# Altium PCB ServoShield.PcbDoc (part 1 of 3)
Units mm, origin at the board's own origin, x right, y up, seen from the top; angles counter-clockwise.
Board outline 82.5 x 82.5 mm, 2 copper layers (Top Layer, Bottom Layer); 43 components, 112 nets, 281 pads, 5423 vias.
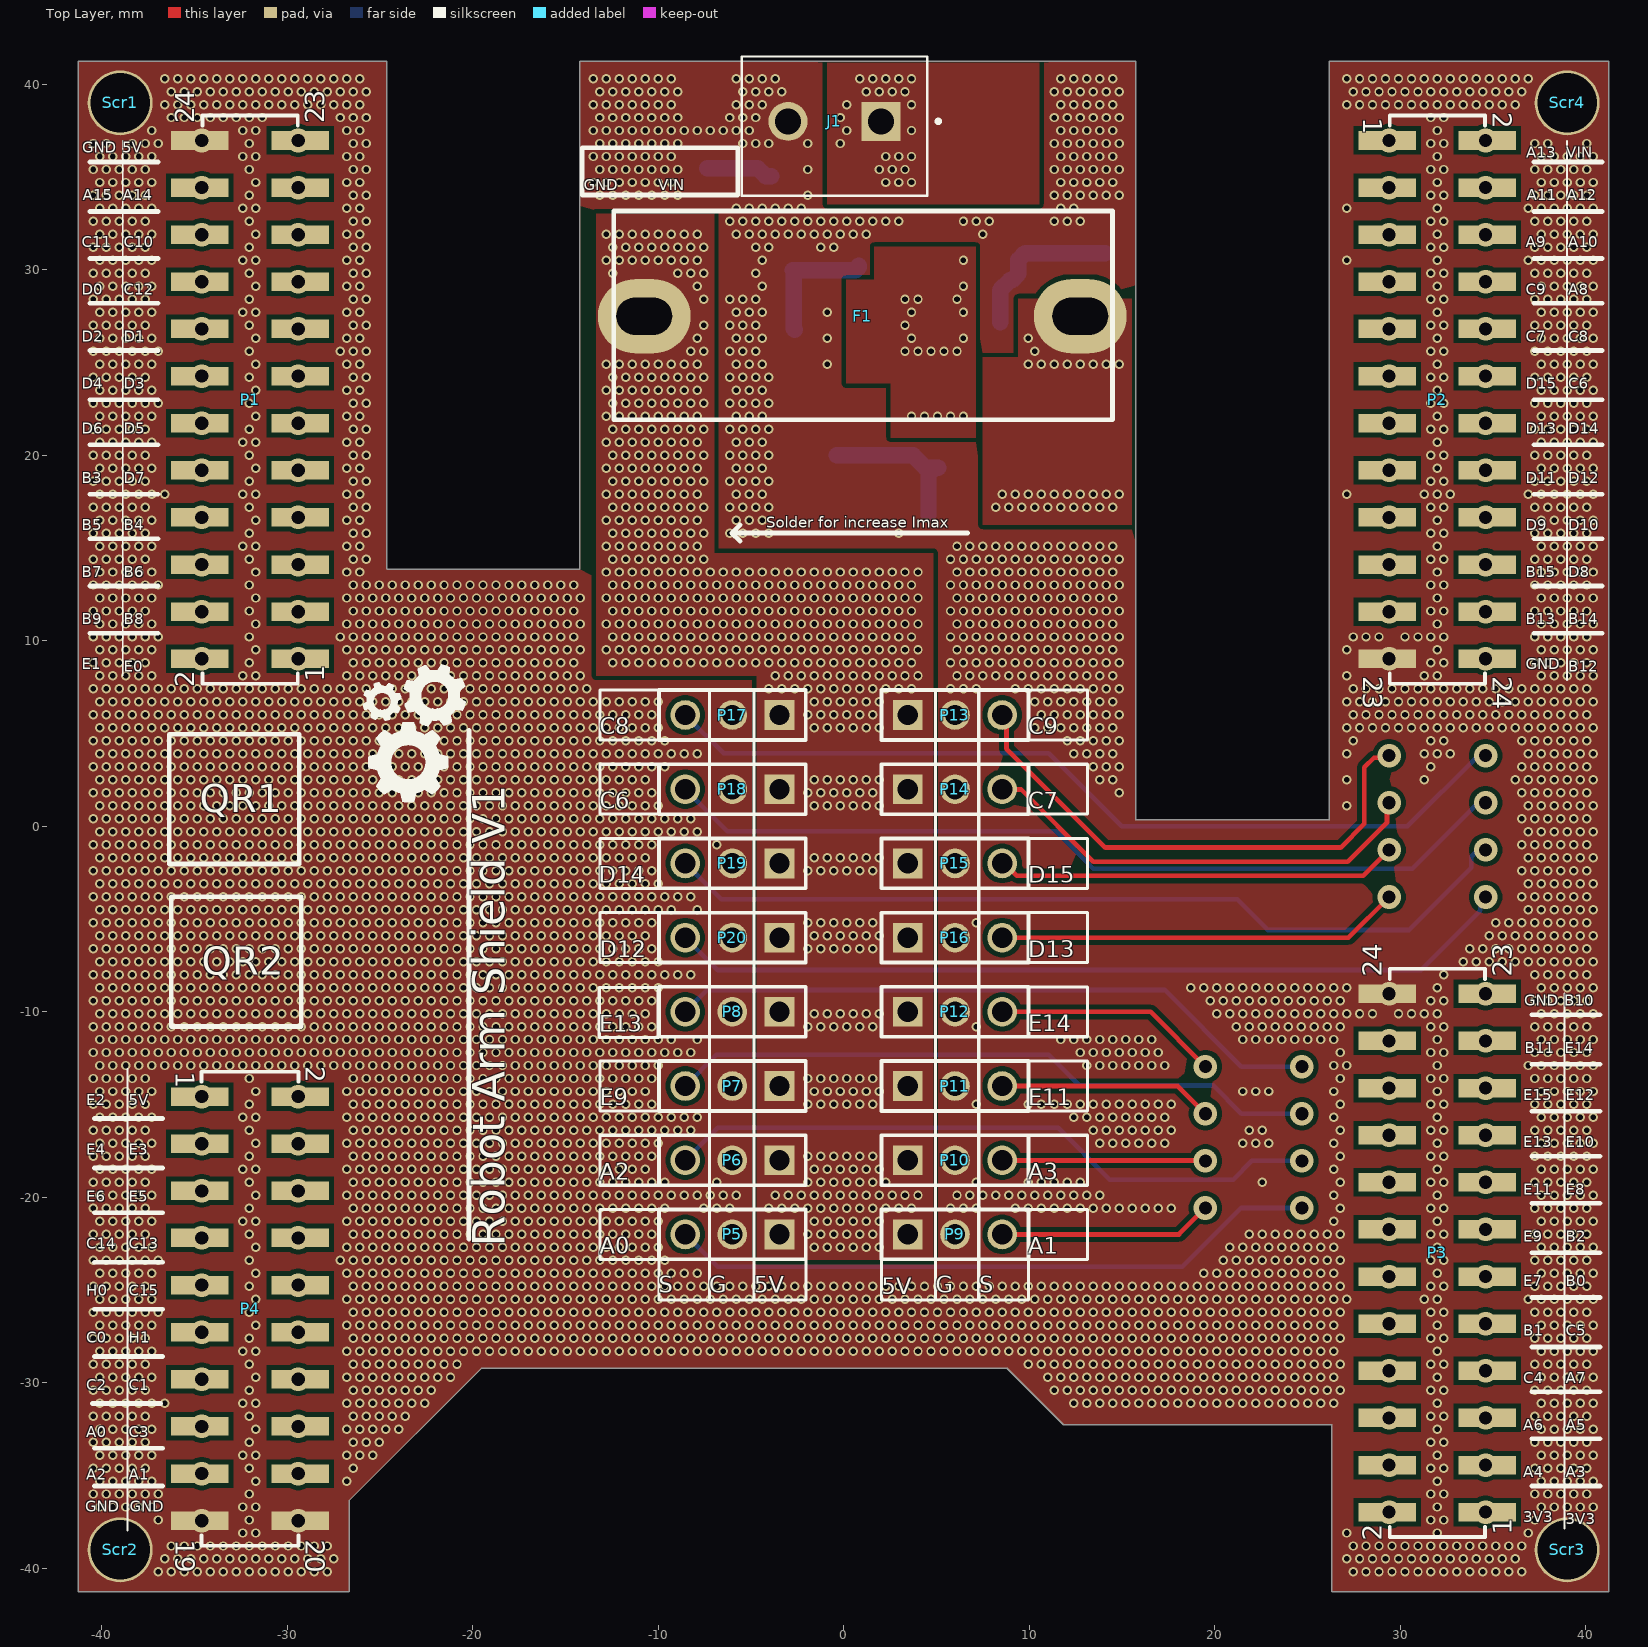
[diagram p0: Top Layer view]
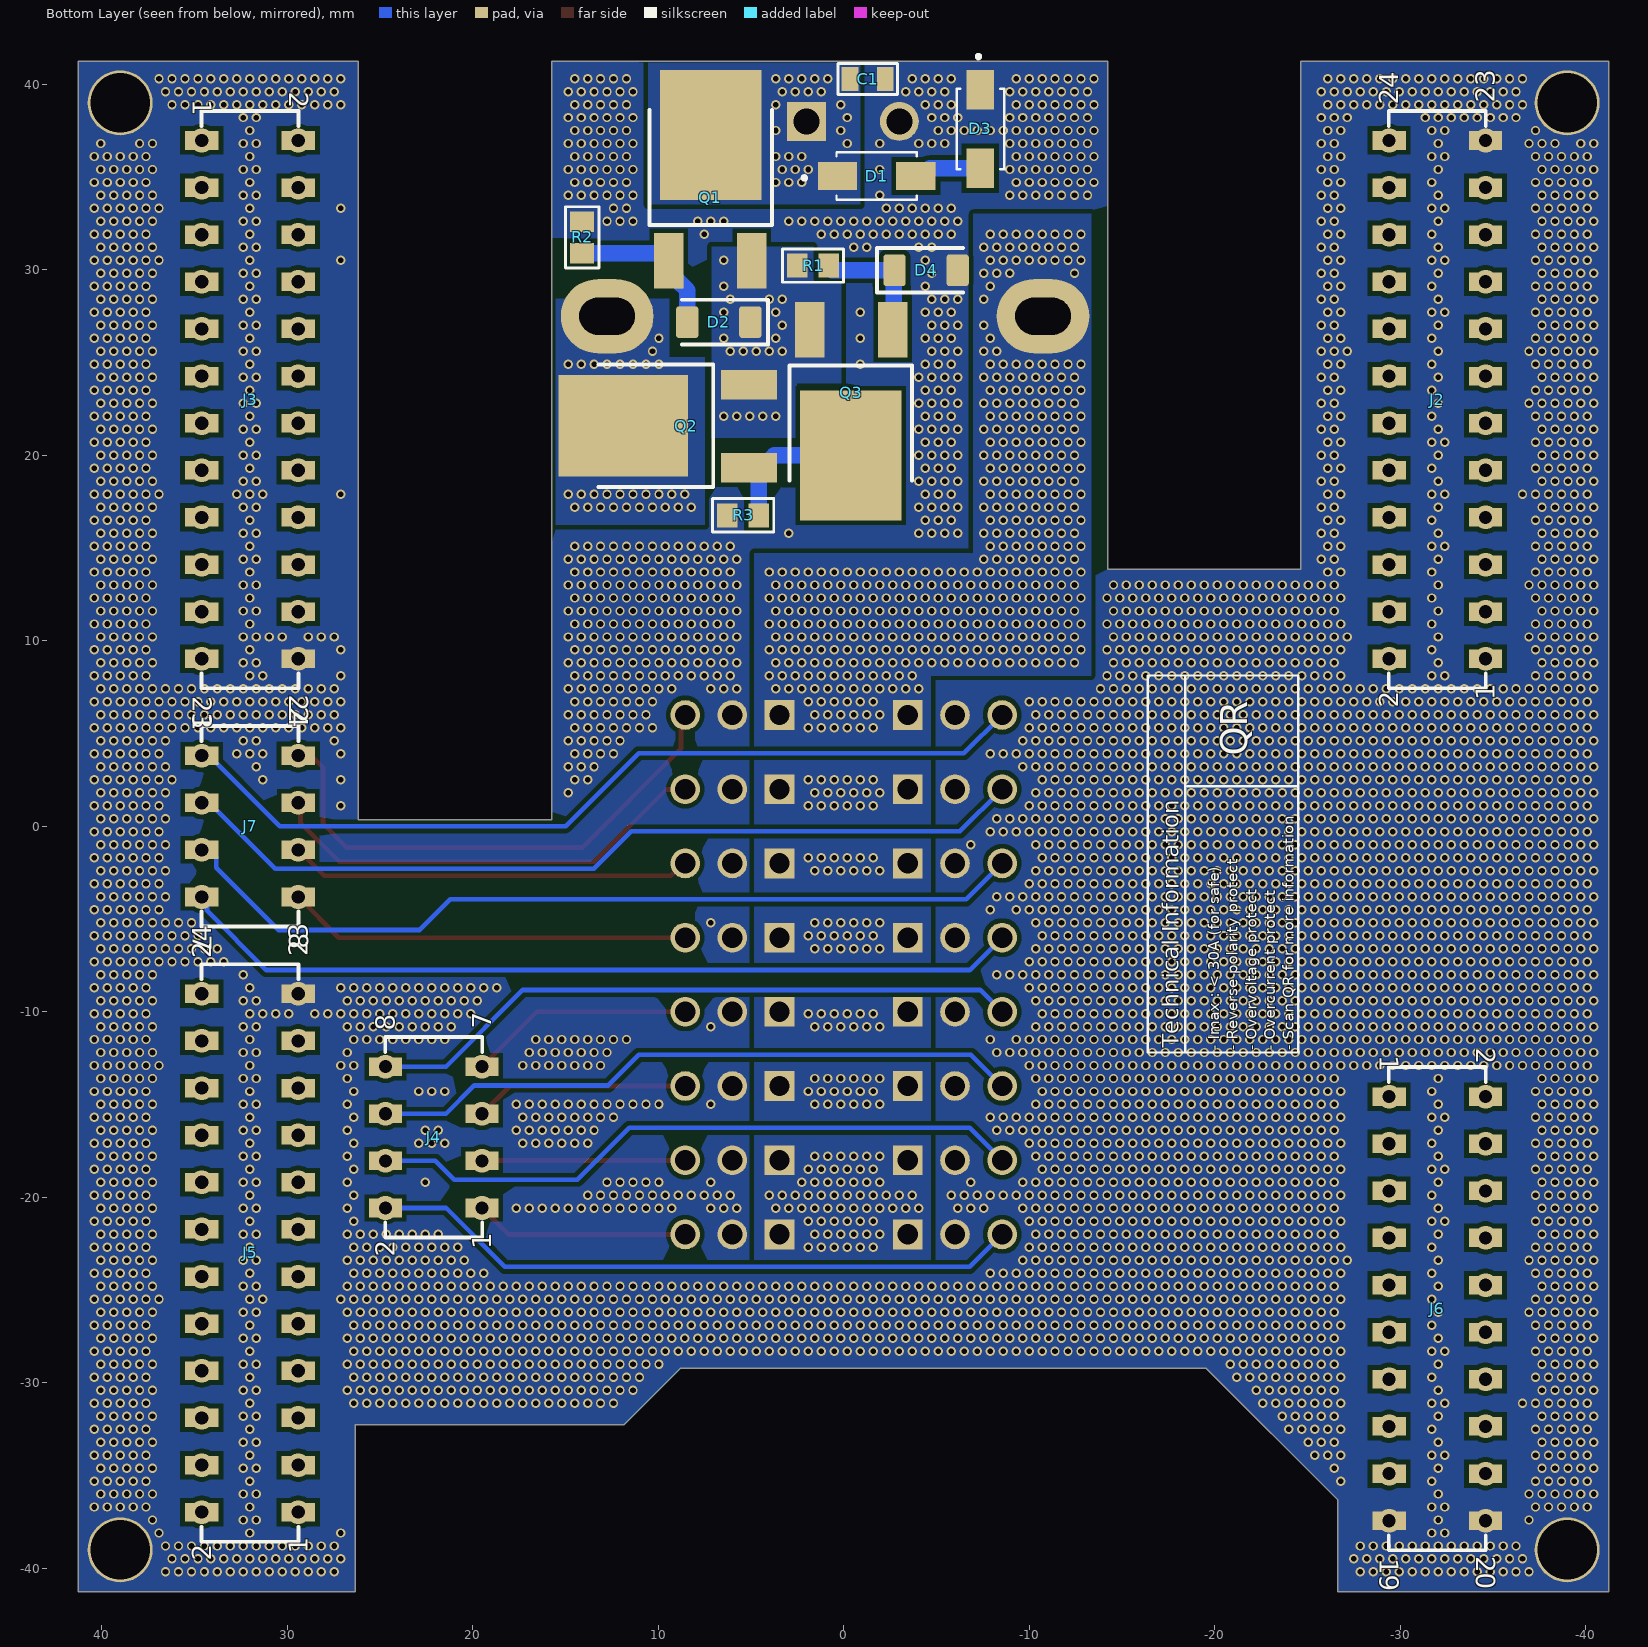
[diagram p1: Bottom Layer view, seen from below]
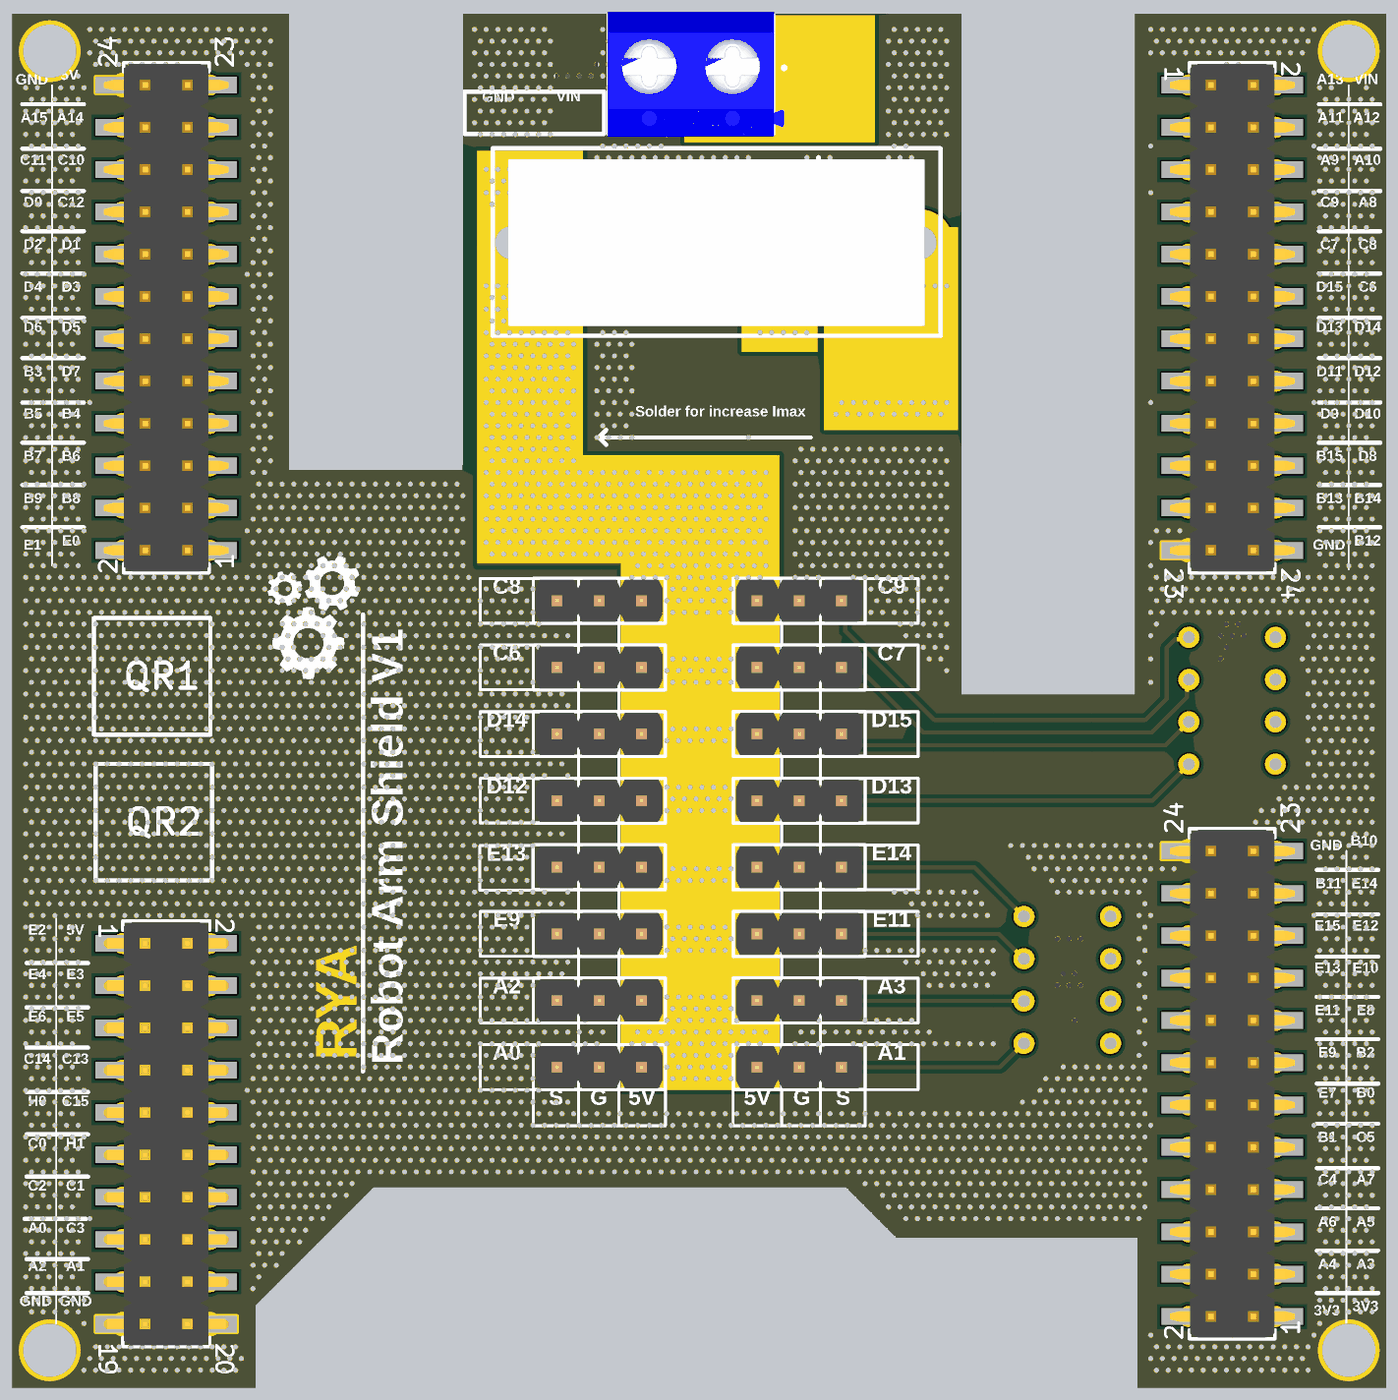
[diagram p4: 3D render of the assembled board from above, using the file's embedded part models]
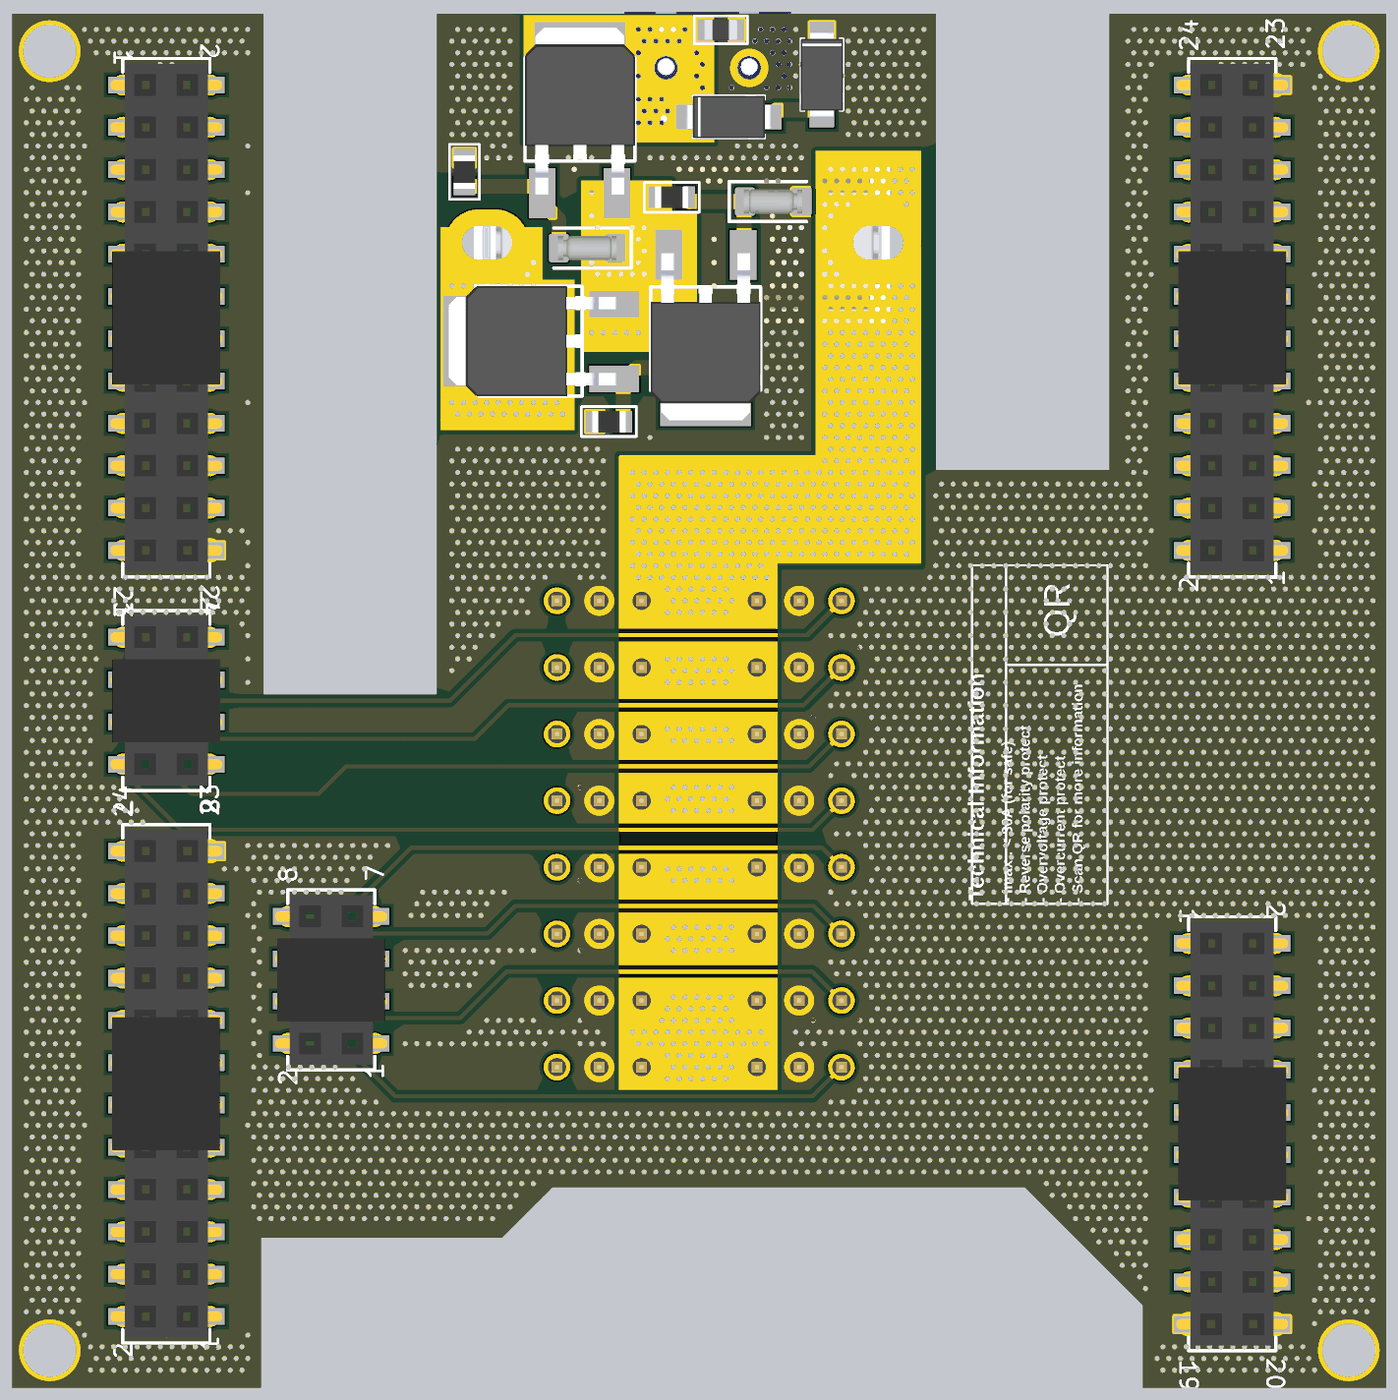
[diagram p5: 3D render of the assembled board from below, using the file's embedded part models]

## Layer stack, top to bottom
Top Solder: solder mask 0.0102, Solder Resist, Dk 3.5
Top Layer: signal copper 0.0356
Dielectric 1: dielectric 0.32, FR-4, Dk 4.8
Bottom Layer: signal copper 0.0356
Bottom Solder: solder mask 0.0102, Solder Resist, Dk 3.5

## Board outline
-26.643,-41.25 -26.643,-36.322 -19.531,-29.21 8.79,-29.21 11.838,-32.258 26.316,-32.258 26.316,-41.25 41.25,-41.25 41.25,41.25 26.162,41.25 26.162,0.356 15.748,0.356 15.748,41.25 -14.224,41.25 -14.224,13.848 -24.638,13.848 -24.638,41.25 -41.25,41.25 -41.25,-41.25

## Design rules (kind name [scope] priority, off if disabled: settings)
Clearance [All] p1: gap=0.254 ignorepadtopadclearanceinfootprint=FALSE
PolygonConnect [All] p1: connectstyle=Direct reliefconductorwidth=0.254 reliefentries=4 polygonreliefangle="90 Angle" airgapwidth=0.254
RoutingVias [All] p1: holewidth=0.711 width=1.27 viastyle="Through Hole" minholewidth=0.711 minwidth=1.27 maxholewidth=0.711 maxwidth=1.27
SolderMaskExpansion [All] p1: expansion=0.102 istentingtop=FALSE
SupplyNets "Schematic Supply Nets_8" [InNet('HD_3V3-1')] p1: voltage=0.000
SupplyNets "Schematic Supply Nets_7" [InNet('HD_5V-2')] p2: voltage=0.000
SupplyNets "Schematic Supply Nets_6" [InNet('HD_5V-1')] p3: voltage=0.000
SupplyNets "Schematic Supply Nets_4" [InNet('HD_Vin')] p4: voltage=0.000
SupplyNets "Schematic Supply Nets_2" [InNet('HD_3V3')] p5: voltage=0.000
SupplyNets "Schematic Supply Nets" [InNet('VDIn')] p6: voltage=0.000
SupplyNets "Schematic Supply Nets_3" [InNet('5V')] p7: voltage=0.000
SupplyNets "Schematic Supply Nets_1" [InNet('GND')] p8: voltage=0.000
Width "Schematic Width Constraint_13" [InNet('NetD2_K')] p1: maxlimit=2.54 minlimit=1.27 preferedwidth=1.27
Width "Schematic Width Constraint_12" [InNet('NetF1_0')] p2: maxlimit=2.54 minlimit=1.27 preferedwidth=1.27
Width "Schematic Width Constraint_11" [InNet('GND')] p3: maxlimit=12.7 minlimit=0.762 preferedwidth=0.889 minimp=50.000000 maximp=50.000000 favimp=50.000000
Width "Schematic Width Constraint_10" [InNet('NetD1_A')] p4: maxlimit=12.7 minlimit=0.762 preferedwidth=0.889 minimp=50.000000 maximp=50.000000 favimp=50.000000
Width "Schematic Width Constraint_9" [InNet('VDIn')] p5: maxlimit=12.7 minlimit=0.762 preferedwidth=0.889 minimp=50.000000 maximp=50.000000 favimp=50.000000
Width "Schematic Width Constraint_8" [InNet('NetD2_A')] p6: maxlimit=5.08 minlimit=0.762 preferedwidth=0.889 minimp=50.000000 maximp=50.000000 favimp=50.000000
Width "Schematic Width Constraint_7" [InNet('VDIn')] p7: maxlimit=5.08 minlimit=0.762 preferedwidth=0.889 minimp=50.000000 maximp=50.000000 favimp=50.000000
Width "Schematic Width Constraint_6" [InNet('NetD4_K')] p8: maxlimit=5.08 minlimit=0.762 preferedwidth=0.889
Width "Schematic Width Constraint_5" [InNet('NetQ2_1')] p9: maxlimit=5.08 minlimit=0.762 preferedwidth=0.889
Width "Schematic Width Constraint_4" [InNet('GND')] p10: maxlimit=5.08 minlimit=0.762 preferedwidth=0.889 minimp=50.000000 maximp=50.000000 favimp=50.000000
Width "Schematic Width Constraint_3" [InNet('NetF1_0')] p11: maxlimit=5.08 minlimit=0.762 preferedwidth=0.889
Width "Schematic Width Constraint_2" [InNet('NetD2_K')] p12: maxlimit=5.08 minlimit=0.762 preferedwidth=0.889 minimp=50.000000 maximp=50.000000 favimp=50.000000
Width "Schematic Width Constraint_1" [InNet('5V')] p13: maxlimit=5.08 minlimit=0.762 preferedwidth=0.889
Width "Schematic Width Constraint" [InNet('5V')] p14: maxlimit=2.54 minlimit=1.27 preferedwidth=1.27
Width [All] p15: maxlimit=0.254 minlimit=0.254 preferedwidth=0.254
30 further rules are at their usual default settings.

## Classes and differential pairs
component class U_Protect: C1 D1 D2 D3 D4 F1 Q1 Q2 Q3 R1 R2 R3
component class U_ServoConnect: P5 P6 P7 P8 P9 P10 P11 P12 P13 P14 P15 P16 P17 P18 P19 P20
component class U_MBoardConnect: J2 J3 J4 J5 J6 J7 P1 P2 P3 P4
component class TopLevelDesign: J1 Scr1 Scr2 Scr3 Scr4

## Components (designator, comment, footprint, x,y, rotation, side; value= is the part's Value field where it differs from the comment)
C1 "0108051041050" CAP_0805 -1.27,40.259 r0 bottom value=100nF
D1 "SMAJ18A" DIOM4325X250N -1.778,35.052 r180 bottom
D2 "ZMM5V1" SOD-80_MiniMELF_Glass 6.731,27.178 r0 bottom value=Shottky-Diode
D3 "SMAJ18A" DIOM4325X250N -7.366,37.592 r270 bottom
D4 "ZMM5V1" SOD-80_MiniMELF_Glass -4.445,29.972 r180 bottom value=Shottky-Diode
F1 "0605203000250" Fuse_Clip_0520 1,27.5 r180 top value="250 VAC, 10A"
J1 "KF301-2P" HANDSON_KF301-2P -0.5,38 r180 top
J2 "61032421821" 61032421821 -32,23 r90 bottom
J3 "61032421821" 61032421821 32,23 r270 bottom
J4 "61030821821" 61030821821 22.098,-16.764 r90 bottom
J5 "61032421821" 61032421821 32,-23 r90 bottom
J6 "61032021821" 61032021821 -32,-26 r270 bottom
J7 "61030821821" 61030821821 32,0 r270 bottom
P1 "61002421121" 61002421121 -32,23 r90 top
P2 "61002421121" 61002421121 32,23 r270 top
P3 "61002421121" 61002421121 32,-23 r90 top
P4 "61032021121" 61032021121 -32,-26 r270 top
P5 "61300311121" 61300311121 -6,-22 r180 top
P6 "61300311121" 61300311121 -6,-18 r180 top
P7 "61300311121" 61300311121 -6,-14 r180 top
P8 "61300311121" 61300311121 -6,-10 r180 top
P9 "61300311121" 61300311121 6,-22 r0 top
P10 "61300311121" 61300311121 6,-18 r0 top
P11 "61300311121" 61300311121 6,-14 r0 top
P12 "61300311121" 61300311121 6,-10 r0 top
P13 "61300311121" 61300311121 6,6 r0 top
P14 "61300311121" 61300311121 6,2 r0 top
P15 "61300311121" 61300311121 6,-2 r0 top
P16 "61300311121" 61300311121 6,-6 r0 top
P17 "61300311121" 61300311121 -6,6 r180 top
P18 "61300311121" 61300311121 -6,2 r180 top
P19 "61300311121" 61300311121 -6,-2 r180 top
P20 "61300311121" 61300311121 -6,-6 r180 top
Q1 "AOD4185" DPAK 7.163,35.408 r180 bottom
Q2 "AOD4185" DPAK 10.033,21.59 r90 bottom
Q3 "AOD4185" DPAK -0.381,21.844 r0 bottom
R1 "0008051031" RESISTOR_0805 1.651,30.226 r0 bottom value="10 KOhm, 1/8 W"
R2 "0008051031" RESISTOR_0805 14.097,31.75 r270 bottom value="10 KOhm, 1/8 W"
R3 "0008051031" RESISTOR_0805 5.422,16.764 r180 bottom value="10 KOhm, 1/8 W"
Scr1 "MP3.2" MP3.2 -39,39 r0 top
Scr2 "MP3.2" MP3.2 -39,-39 r0 top
Scr3 "MP3.2" MP3.2 39,-39 r0 top
Scr4 "MP3.2" MP3.2 39,39 r0 top

## Footprints (in the part's own frame and the unit in brackets; to place one, negate y for a bottom-side part, rotate by r counter-clockwise, add the part's x,y. Pads: shape width x height; smd on the part's side, far side on the other; paste and mask are expansions set on the pad)
61002421121 [mm] "Pin Header, pitch 2.54 mm, SMD, Vertical, dual row, 24p"
  rect 1x3.1 smd: 1(-13.97,-2.7) 2(-13.97,2.7) 3(-11.43,-2.7) 4(-11.43,2.7) 5(-8.89,-2.7) 6(-8.89,2.7) 7(-6.35,-2.7) 8(-6.35,2.7) 9(-3.81,-2.7) 10(-3.81,2.7) 11(-1.27,-2.7) 12(-1.27,2.7) 13(1.27,-2.7) 14(1.27,2.7) 15(3.81,-2.7) 16(3.81,2.7) 17(6.35,-2.7) 18(6.35,2.7) 19(8.89,-2.7) 20(8.89,2.7) 21(11.43,-2.7) 22(11.43,2.7) 23(13.97,-2.7) 24(13.97,2.7)
  silkscreen extent -15.32,-2.56 15.32,2.57, body extent -15.24,-3.75 15.24,3.75, height 9.62
61030821821 [mm] "Socket Header, Pitch 2.54 mm, SMT, Vertical, dual row, 8p"
  rect 1x1.8 smd: 1(-3.81,-2.6) 2(-3.81,2.6) 3(-1.27,-2.6) 4(-1.27,2.6) 5(1.27,-2.6) 6(1.27,2.6) 7(3.81,-2.6) 8(3.81,2.6)
  silkscreen extent -5.41,-2.62 5.41,2.62, body extent -5.08,-3.35 5.08,3.35, height 8.52
61032021121 [mm] "Pin Header, pitch 2.54 mm, SMD, Vertical, dual row, 20p"
  rect 1x3.1 smd: 1(-11.43,-2.7) 2(-11.43,2.7) 3(-8.89,-2.7) 4(-8.89,2.7) 5(-6.35,-2.7) 6(-6.35,2.7) 7(-3.81,-2.7) 8(-3.81,2.7) 9(-1.27,-2.7) 10(-1.27,2.7) 11(1.27,-2.7) 12(1.27,2.7) 13(3.81,-2.7) 14(3.81,2.7) 15(6.35,-2.7) 16(6.35,2.7) 17(8.89,-2.7) 18(8.89,2.7) 19(11.43,-2.7) 20(11.43,2.7)
  silkscreen extent -12.78,-2.62 12.78,2.62, body extent -12.7,-3.75 12.7,3.75, height 9.62
61032021821 [mm] "Socket Header, Pitch 2.54 mm, SMT, Vertical, dual row, 20p"
  rect 1x1.8 smd: 1(-11.43,-2.6) 2(-11.43,2.6) 3(-8.89,-2.6) 4(-8.89,2.6) 5(-6.35,-2.6) 6(-6.35,2.6) 7(-3.81,-2.6) 8(-3.81,2.6) 9(-1.27,-2.6) 10(-1.27,2.6) 11(1.27,-2.6) 12(1.27,2.6) 13(3.81,-2.6) 14(3.81,2.6) 15(6.35,-2.6) 16(6.35,2.6) 17(8.89,-2.6) 18(8.89,2.6) 19(11.43,-2.6) 20(11.43,2.6)
  silkscreen extent -13.03,-2.62 13.03,2.62, body extent -12.7,-3.35 12.7,3.35, height 8.52
61032421821 [mm] "Socket Header, Pitch 2.54 mm, SMT, Vertical, dual row, 24p"
  rect 1x1.8 smd: 1(-13.97,-2.6) 2(-13.97,2.6) 3(-11.43,-2.6) 4(-11.43,2.6) 5(-8.89,-2.6) 6(-8.89,2.6) 7(-6.35,-2.6) 8(-6.35,2.6) 9(-3.81,-2.6) 10(-3.81,2.6) 11(-1.27,-2.6) 12(-1.27,2.6) 13(1.27,-2.6) 14(1.27,2.6) 15(3.81,-2.6) 16(3.81,2.6) 17(6.35,-2.6) 18(6.35,2.6) 19(8.89,-2.6) 20(8.89,2.6) 21(11.43,-2.6) 22(11.43,2.6) 23(13.97,-2.6) 24(13.97,2.6)
  silkscreen extent -15.57,-2.62 15.57,2.62, body extent -15.24,-3.35 15.24,3.35, height 8.52
61300311121 [mm] "Pin Header, pitch 2.54 mm, THT, Vertical, single row, 3p"
  rect 1.6x1.6 hole 1.1: 1(-2.54,0)
  round 1.6 hole 1.1: 2(0,0) 3(2.54,0)
  silkscreen extent -3.96,-1.35 3.96,1.35, body extent -3.81,-1.27 3.81,1.27, height 8.57
CAP_0805 [mm]
  rect 0.9x1.3 smd: 1(-0.975,-0.025) 2(0.925,-0.025)
  silkscreen extent -1.63,-0.86 1.57,0.81, body extent -1.03,-0.65 0.97,0.6, height 0.6
DIOM4325X250N [mm]
  rect 2.12x1.5 smd: A(2.115,0) C(-2.115,0)
  silkscreen extent -4,-1.28 2.16,1.28, body extent -2.57,-1.28 2.57,1.28, height 2.5
DPAK [mil]
  rect 63x118 smd: 1(-89,-194) 3(87,-194)
  rect 214.63x275.59 smd: 4(0,72.94)
  silkscreen extent -130,-118 130,126, body extent -130,-198 130,198, height 94
Fuse_Clip_0520 [mm] "Clip Fuse, Size 0520"
  oval 5x4 hole 2 slot 3 at 0 deg: 0(-11.75,0) 1(11.75,0)
  silkscreen extent -13.49,-5.67 13.4,5.59, body extent -12.53,-5 12.47,5, height 15.1
HANDSON_KF301-2P [mm]
  rect 2.1x2.1 hole 1.4: 1(-2.5,0)
  round 2.1 hole 1.4: 2(2.5,0)
  silkscreen extent -5.7,-3.5 5,4, body extent -5.6,-3.37 5,4.13, height 10.13
MP3.2 [mm]
  round 3.5 hole 3.2: 1(0,0)
  body extent -2.75,-2.75 2.74,2.75, height 2.98
RESISTOR_0805 [mm] "Chip Resistor, 2-Leads, Body 2,00x1,20mm, IPC Medium Density"
  rect 1.1x1.3 smd: 1(-0.85,0) 2(0.85,0)
  silkscreen extent -1.65,-0.9 1.65,0.9, body extent -1,-0.65 1,0.65, height 0.45
SOD-80_MiniMELF_Glass [mm]
  rrect25% 1.2x1.7 smd: A(1.7,0) K(-1.7,0)
  silkscreen extent -2.65,-1.2 2,1.2, body extent -1.76,-0.72 1.74,0.72, height 1.45

## Part data
C1: library part CMP-001-00259-1, "CAP, size 0805, 0.1 nF, 50 VDC", Manufacture Name=TDK, Manufacture SN=CGA4J2X8R1H104K125AD, Operating Temperature="-55 to +125degC", Tolerance=10%, Voltage Rating DC="50 VDC", Component Type=Standard, Design Item ID=0108051041050, Mounting Technology=SMT, Packaging="Tape and Reel", Pins=2, Size=0805, Source=Capacitor_0805_10_percent.SchLib, Supplier 1 Name=Mouser, Supplier 1 SN=810-C2012X8R1H104KEP, Supplier 1 URL=https://www.mouser.vn/ProductDetail/TDK/CGA4J2X8R1H104K125AD?qs=LcTL%2F5vFEzExqZqv3rh1qQ%3D%3D&utm_source=mouser-refine-download&utm_medium=file&utm_campaign=CGA4J2X8R1H104K125AD&utm_content=TDK, Supplier 2 Name=Digi-Key, Supplier 2 SN=445-8810-2-ND, Supplier 2 URL=https://www.digikey.com/en/products/detail/tdk-corporation/cga4j2x8r1h104k125ad/3248169, Supplier 3 Name=thegioiic, Supplier 3 SN=OEM, Supplier 3 URL=N/A
D1 D3: library part CMP-004-00085-1, "400W, 21.1V, 5%, Unidirectional, TVS", Case/Package="SMA-2 Taiwan Semiconductor", Check_prices=https://www.snapeda.com/parts/SMAJ18A/taiwan/view-part/?ref=eda, Component Type=Standard, Design Item ID=SMAJ18A, MF="Taiwan Semiconductor", MP=SMAJ18A, Pins=2, SnapEDA_Link=https://www.snapeda.com/parts/SMAJ18A/taiwan/view-part/?ref=snap, Source=SMAJ18A.SchLib
D2 D4: library part CMP-004-00086-2, Component Type=Standard, Datasheet=https://diotec.com/de/produktliste/SBD.html, Design Item ID=Schottky-Diode, ki_description="Schottky Diode", ki_keywords=Schottky, Pins=2, Reference=D, Source=schottky-diode.SchLib
F1: library part CMP-005-00030-1, "Ceramic Fuse, Size 0520, 250 VAC, 30A", Hold Current=10A, Manufacturer=Littelfuse, Threshold Current="1.5kA (250VAC)", Threshold Voltage=250VAC, Component Type=Standard, ComponentLink1Description="Datasheet link", ComponentLink1URL=https://www.littelfuse.com/~/media/electronics/datasheets/fuses/littelfuse_fuse_234_datasheet.pdf.pdf, ComponentLink2Description="Supplier 1 URL", ComponentLink2URL=https://www.mouser.vn/ProductDetail/Littelfuse/0215010.MXP?qs=qI%252BDxnNls1%252BmXG81o%252BQ0mA%3D%3D, ComponentLink3Description="Supplier 2 URL", ComponentLink3URL=https://www.digikey.com/en/products/detail/littelfuse-inc/0215010-MXP/777449, ComponentLink4Description="Supplier 3 URL", ComponentLink4URL=https://www.thegioiic.com/cau-chi-su-10a-5x20mm, Design Item ID=0605201000250, Mounting Technology="Holder / Clip", Pins=2, Size=0520, Source=Fuse_Clip.SchLib, Supplier 1 Name=Mouser, Supplier 1 SN=576-0215010.MXP, Supplier 1 URL=https://www.mouser.vn/ProductDetail/Littelfuse/0215010.MXP?qs=qI%252BDxnNls1%252BmXG81o%252BQ0mA%3D%3D, Supplier 2 Name=Digi-Key, Supplier 2 SN=F1699-ND, Supplier 2 URL=https://www.digikey.com/en/products/detail/littelfuse-inc/0215010-MXP/777449, Supplier 3 Name=thegioiic, Supplier 3 SN=N/A, Supplier 3 URL=https://www.thegioiic.com/cau-chi-su-10a-5x20mm
J1: library part CMP-118-000001-1, "2 Pin Terminal Block 5mm Pitch", Package=None, Availability=Unavailable, Design Item ID=KF301-2P, MP=KF301-2P, Price=None, Source=KF301-2P.SchLib
J2 J3 J5: library part CMP-002-00462-1, "WR-PHD Socket Header, SMT, pitch 2.54mm, Dual Row, Vertical, 24p", Contact Resistance=20mOhm, Manufacturer="Wurth Elektronik", Operating Temperature="-40 to +105degC", Rated Current=3A, Withstanding Voltage=600VAC, Working Voltage=250VAC, Component Type=Standard, ComponentLink1Description=Manufacturer, ComponentLink1URL=http://www.we-online.de, ComponentLink2Description=Datasheet, ComponentLink2URL=https://www.we-online.com/catalog/datasheet/61032421821.pdf, ComponentLink3Description="Global Supply", ComponentLink3URL=https://www.we-online.com/en/components/products/PHD_2_54_SMT_DUAL_SOCKET_HEADER_6100XX21821?sq=61032421821#61032421821, ComponentLink4Description="Global Supply", ComponentLink4URL=https://www.mouser.vn/ProductDetail/Wurth-Elektronik/61032421821?qs=Cb2nCFKsA8olwuXV8WYPMw%3D%3D, Design Item ID=61032421821, Gender="Socket Header", Manufacturer Part Number=61032421821, Mounting Technology=SMT, Orientation=Vertical, Packaging="Tape and Reel", Pin Number=24, Pins=24, Pitch=2.54mm, Published Date="May 2020", Row Number=Dual, Source="WR-PHD_Socket Header_2.54mm.SchLib", Supplier 1 Name=Mouser, Supplier 1 SN=710-61032421821, Supplier 1 URL=https://www.mouser.vn/ProductDetail/Wurth-Elektronik/61032421821?qs=Cb2nCFKsA8olwuXV8WYPMw%3D%3D, Supplier 2 Name=Digi-Key, Supplier 2 SN=N/A, Supplier 2 URL=N/A, Supplier 3 Name=thegioiic, Supplier 3 SN=N/A, Supplier 3 URL=N/A, System=Connector
J4 J7: library part CMP-002-00443-1, "WR-PHD Socket Header, SMT, pitch 2.54mm, Dual Row, Vertical, 8p", Contact Resistance=20mOhm, Manufacturer="Wurth Elektronik", Operating Temperature="-40 to +105degC", Rated Current=3A, Withstanding Voltage=600VAC, Working Voltage=250VAC, Component Type=Standard, ComponentLink1Description=Manufacturer, ComponentLink1URL=http://www.we-online.de, ComponentLink2Description=Datasheet, ComponentLink2URL=https://www.we-online.com/catalog/datasheet/61030821821.pdf, ComponentLink3Description="Global Supply", ComponentLink3URL=https://www.we-online.com/en/components/products/PHD_2_54_SMT_DUAL_SOCKET_HEADER_6100XX21821?sq=61030821821#61030821821, ComponentLink4Description="Global Supply", ComponentLink4URL=https://www.mouser.vn/ProductDetail/Wurth-Elektronik/61030821821?qs=Cb2nCFKsA8oJEHHhLPQ3%2Fg%3D%3D, Design Item ID=61030821821, Gender="Socket Header", Manufacturer Part Number=61030821821, Mounting Technology=SMT, Orientation=Vertical, Packaging="Tape and Reel", Pin Number=8, Pins=8, Pitch=2.54mm, Published Date="May 2020", Row Number=Dual, Source="WR-PHD_Socket Header_2.54mm.SchLib", Supplier 1 Name=Mouser, Supplier 1 SN=710-61030821821, Supplier 1 URL=https://www.mouser.vn/ProductDetail/Wurth-Elektronik/61030821821?qs=Cb2nCFKsA8oJEHHhLPQ3%2Fg%3D%3D, Supplier 2 Name=Digi-Key, Supplier 2 SN=N/A, Supplier 2 URL=N/A, Supplier 3 Name=thegioiic, Supplier 3 SN=N/A, Supplier 3 URL=N/A, System=Connector
J6: library part CMP-002-00459-1, "WR-PHD Socket Header, SMT, pitch 2.54mm, Dual Row, Vertical, 20p", Contact Resistance=20mOhm, Manufacturer="Wurth Elektronik", Operating Temperature="-40 to +105degC", Rated Current=3A, Withstanding Voltage=600VAC, Working Voltage=250VAC, Component Type=Standard, ComponentLink1Description=Manufacturer, ComponentLink1URL=http://www.we-online.de, ComponentLink2Description=Datasheet, ComponentLink2URL=https://www.we-online.com/catalog/datasheet/61032021821.pdf, ComponentLink3Description="Global Supply", ComponentLink3URL=https://www.we-online.com/en/components/products/PHD_2_54_SMT_DUAL_SOCKET_HEADER_6100XX21821?sq=61032021821#61032021821, ComponentLink4Description="Global Supply", ComponentLink4URL=https://www.mouser.vn/ProductDetail/Wurth-Elektronik/61032021821?qs=Cb2nCFKsA8rLJ0ZbRtJw1w%3D%3D, Design Item ID=61032021821, Gender="Socket Header", Manufacturer Part Number=61032021821, Mounting Technology=SMT, Orientation=Vertical, Packaging="Tape and Reel", Pin Number=20, Pins=20, Pitch=2.54mm, Published Date="May 2020", Row Number=Dual, Source="WR-PHD_Socket Header_2.54mm.SchLib", Supplier 1 Name=Mouser, Supplier 1 SN=710-61032021821, Supplier 1 URL=https://www.mouser.vn/ProductDetail/Wurth-Elektronik/61032021821?qs=Cb2nCFKsA8rLJ0ZbRtJw1w%3D%3D, Supplier 2 Name=Digi-Key, Supplier 2 SN=N/A, Supplier 2 URL=N/A, Supplier 3 Name=thegioiic, Supplier 3 SN=N/A, Supplier 3 URL=N/A, System=Connector
P1 P2 P3: library part CMP-002-00395-1, "WR-PHD Pin Header, SMT, pitch 2.54mm, Dual Row, Vertical, 24p", Contact Resistance=20mOhm, Manufacturer="Wurth Elektronik", Operating Temperature="-40 to +125degC", Rated Current=3A, Withstanding Voltage=500VAC, Working Voltage=250VAC, Component Type=Standard, ComponentLink1Description=Manufacturer, ComponentLink1URL=http://www.we-online.de, ComponentLink2Description=Datasheet, ComponentLink2URL=https://www.we-online.com/catalog/datasheet/61002421121.pdf, ComponentLink3Description="Global Supply", ComponentLink3URL=https://www.we-online.com/en/components/products/PHD_2_54_SMT_DUAL_PIN_HEADER_6100XX21121?sq=61002421121#61002421121, ComponentLink4Description="Global Supply", ComponentLink4URL=https://www.mouser.vn/ProductDetail/Wurth-Elektronik/61002421121?qs=PhR8RmCirEaUrVIpVd3oMg%3D%3D, Design Item ID=61002421121, Gender="Pin Header", Manufacturer Part Number=61002421121, Mounting Technology=SMT, Orientation=Vertical, Packaging=Tube, Pin Number=24, Pins=24, Pitch=2.54mm, Published Date="May 2020", Row Number=Dual, Source="WR-PHD_Pin Header_2.54mm.SchLib", Supplier 1 Name=Mouser, Supplier 1 SN=710-61002421121, Supplier 1 URL=https://www.mouser.vn/ProductDetail/Wurth-Elektronik/61002421121?qs=PhR8RmCirEaUrVIpVd3oMg%3D%3D, Supplier 2 Name=Digi-Key, Supplier 2 SN=N/A, Supplier 2 URL=N/A, Supplier 3 Name=thegioiic, Supplier 3 SN=N/A, Supplier 3 URL=N/A, Supply name 1=Mouser, System=Connector
P4: library part CMP-002-00458-1, "WR-PHD Pin Header, SMT, pitch 2.54mm, Dual Row, Vertical, 20p", Contact Resistance=20mOhm, Manufacturer="Wurth Elektronik", Operating Temperature="-40 to +125degC", Rated Current=3A, Withstanding Voltage=500VAC, Working Voltage=250VAC, Component Type=Standard, ComponentLink1Description=Manufacturer, ComponentLink1URL=http://www.we-online.de, ComponentLink2Description=Datasheet, ComponentLink2URL=https://www.we-online.com/catalog/datasheet/61032021121.pdf, ComponentLink3Description="Global Supply", ComponentLink3URL=https://www.we-online.com/en/components/products/PHD_2_54_SMT_DUAL_PIN_HEADER_6100XX21121?sq=61032021121#61032021121, ComponentLink4Description="Global Supply", ComponentLink4URL=https://www.mouser.vn/ProductDetail/Wurth-Elektronik/61032021121?qs=PhR8RmCirEazLxlZVVgCjg%3D%3D, Design Item ID=61032021121, Gender="Pin Header", Manufacturer Part Number=61032021121, Mounting Technology=SMT, Orientation=Vertical, Packaging="Tape and Reel", Pin Number=20, Pins=20, Pitch=2.54mm, Published Date="May 2020", Row Number=Dual, Source="WR-PHD_Pin Header_2.54mm.SchLib", Supplier 1 Name=Mouser, Supplier 1 SN=710-61032021121, Supplier 1 URL=https://www.mouser.vn/ProductDetail/Wurth-Elektronik/61032021121?qs=PhR8RmCirEazLxlZVVgCjg%3D%3D, Supplier 2 Name=Digi-Key, Supplier 2 SN=N/A, Supplier 2 URL=N/A, Supplier 3 Name=thegioiic, Supplier 3 SN=N/A, Supplier 3 URL=N/A, Supply name 1=Mouser, System=Connector
P5 P6 P7 P8 P9 P10 P11 P12 P13 P14 P15 P16 P17 P18 P19 P20: library part CMP-002-00470-1, "WR-PHD Pin Header, THT, pitch 2.54mm, Single Row, Vertical, 3p", Contact Resistance=20mOhm, Manufacturer="Wurth Elektronik", Operating Temperature="-40 to +105degC", Rated Current=3A, Withstanding Voltage=500VAC, Working Voltage=250VAC, Component Type=Standard, ComponentLink1Description=Manufacturer, ComponentLink1URL=http://www.we-online.de, ComponentLink2Description=Datasheet, ComponentLink2URL=https://www.we-online.com/catalog/datasheet/61300311121.pdf, ComponentLink3Description="Global Supply", ComponentLink3URL=https://www.mouser.vn/ProductDetail/Wurth-Elektronik/61300311121?qs=PhR8RmCirEYxRWFJzNKsUw%3D%3D, Design Item ID=61300311121, Gender="Pin Header", Manufacturer Part Number=61300311121, Mounting Technology=THT, Orientation=Vertical, Packaging=Bag, Pin Number=3, Pins=3, Pitch=2.54mm, Published Date="May 2020", Row Number=Single, Source="WR-PHD_Pin Header_2.54mm.SchLib", Supplier 1 Name=Mouser, Supplier 1 SN=710-61300311121, Supplier 1 URL=https://www.mouser.vn/ProductDetail/Wurth-Elektronik/61300311121?qs=PhR8RmCirEYxRWFJzNKsUw%3D%3D, Supplier 2 Name=Digi-Key, Supplier 2 SN=N/A, Supplier 2 URL=N/A, Supplier 3 Name=thegioiic, Supplier 3 SN=N/A, Supplier 3 URL=N/A, Supply name 1=Mouser
Q1 Q2 Q3: library part CMP-123-000001-2, "P-Channel 40V 40A (Tc) 2.5W (Ta), 62.5W (Tc) Surface Mount TO-252, (D-Pak)", Package="TO-252 Alpha &amp; Omega Semiconductor", Check_prices=https://www.snapeda.com/parts/AOD4185/Alpha/view-part/?ref=eda, Component Type=Standard, Design Item ID=AOD4185, MF="Alpha &", MP=AOD4185, Pin Count=3, SnapEDA_Link=https://www.snapeda.com/parts/AOD4185/Alpha/view-part/?ref=snap, Source=AOD4185.SchLib
R1 R2 R3: library part CMP-009-00482-1, "RES, size 0805, 10 KOhm, 1/8 W", Manufacture  Name="Vishay Dale", Manufacture  SN=CRCW080515K0FKEAC, Rated Power="1/8 W", Resistance Tolerance=+/-1%, Component Type=Standard, ComponentLink1Description="Datasheet link", ComponentLink1URL=https://www.vishay.com/docs/28773/crcwce3.pdf, ComponentLink2Description="Supplier 1 URL", ComponentLink2URL=https://www.mouser.vn/ProductDetail/Vishay-Dale/CRCW080515K0FKEA?qs=bMjB6bAaLEM4rXT2DoR3BA%3D%3D, ComponentLink3Description="Supplier 2 URL", ComponentLink3URL=https://www.digikey.com/en/products/detail/vishay-dale/CRCW080515K0FKEAC/7928558, ComponentLink4Description="Supplier 3 URL", ComponentLink4URL=N/A, Design Item ID=0008051531, Mounting Technology=SMT, Pins=2, Size=0805, Source=Resistor_0805.SchLib, Supplier 1 Name=Mouser, Supplier 1 SN=71-CRCW0805-15K-E3, Supplier 1 URL=https://www.mouser.vn/ProductDetail/Vishay-Dale/CRCW080515K0FKEA?qs=bMjB6bAaLEM4rXT2DoR3BA%3D%3D, Supplier 2 Name=Digi-Key, Supplier 2 SN=541-4136-2-ND, Supplier 2 URL=https://www.digikey.com/en/products/detail/vishay-dale/CRCW080515K0FKEAC/7928558, Supplier 3 Name=Thegioiic, Supplier 3 SN=N/A, Supplier 3 URL=N/A
Scr1 Scr2 Scr3 Scr4: library part CMP-143-000000-1, Component Type=Standard, Design Item ID=MP3.2, Pin Count=1, Source=MP_3P2.SchLib

## Via types
v1: diameter 0.508, hole 0.3, Top Layer to Bottom Layer, tented both sides, 5315 vias
v2: diameter 1.27, hole 0.711, Top Layer to Bottom Layer, 108 vias

## Nets (pads, with @x,y where several pads share a name; then routed paths per layer and width w, separated by ;. In a path a pad name is that pad's centre, name@x,y a point inside that pad or via, vN(x,y) a via of type N, cw(c..) or ccw(c..) an arc to the next point about the centre after c; other vN are vias at no path point)
5V: F1.1 P5.1 P6.1 P7.1 P8.1 P9.1 P10.1 P11.1 P12.1 P13.1 P14.1 P15.1 P16.1 P17.1 P18.1 P19.1 P20.1
  other v1: -1.593,-22.693 -0.893,-22.693 -0.193,-22.693 0.507,-22.693 1.207,-22.693 1.907,-22.693 -1.943,-21.993 -1.243,-21.993 -0.543,-21.993 0.157,-21.993 0.857,-21.993 1.557,-21.993 -1.593,-21.293 -0.893,-21.293 -0.193,-21.293 0.507,-21.293 1.207,-21.293 1.907,-21.293 -4.043,-20.593 -3.343,-20.593 -2.643,-20.593 -1.943,-20.593 -1.243,-20.593 -0.543,-20.593 0.157,-20.593 0.857,-20.593 1.557,-20.593 2.257,-20.593 2.957,-20.593 3.657,-20.593 -3.693,-19.893 -2.993,-19.893 -2.293,-19.893 -1.593,-19.893 -0.893,-19.893 -0.193,-19.893 0.507,-19.893 1.207,-19.893 1.907,-19.893 2.607,-19.893 3.307,-19.893 4.007,-19.893 -1.943,-19.193 -1.243,-19.193 -0.543,-19.193 0.157,-19.193 0.857,-19.193 1.557,-19.193 2.257,-19.193 -1.593,-18.493 -0.893,-18.493 -0.193,-18.493 0.507,-18.493 1.207,-18.493 1.907,-18.493 -1.943,-17.793 -1.243,-17.793 -0.543,-17.793 0.157,-17.793 0.857,-17.793 1.557,-17.793 -1.943,-14.993 -1.243,-14.993 -0.543,-14.993 0.157,-14.993 0.857,-14.993 1.557,-14.993 -1.593,-14.293 -0.893,-14.293 -0.193,-14.293 0.507,-14.293 1.207,-14.293 1.907,-14.293 -1.943,-13.593 -1.243,-13.593 -0.543,-13.593 0.157,-13.593 0.857,-13.593 1.557,-13.593 -1.943,-10.793 -1.243,-10.793 -0.543,-10.793 0.157,-10.793 0.857,-10.793 1.557,-10.793 -1.593,-10.093 -0.893,-10.093 -0.193,-10.093 0.507,-10.093 1.207,-10.093 1.907,-10.093 -1.943,-6.593 -1.243,-6.593 -0.543,-6.593 0.157,-6.593 0.857,-6.593 1.557,-6.593 -1.593,-5.893 -0.893,-5.893 -0.193,-5.893 0.507,-5.893 1.207,-5.893 1.907,-5.893 -1.943,-5.193 -1.243,-5.193 -0.543,-5.193 0.157,-5.193 0.857,-5.193 1.557,-5.193 -1.943,-2.393 -1.243,-2.393 -0.543,-2.393 0.157,-2.393 0.857,-2.393 1.557,-2.393 -1.593,-1.693 -0.893,-1.693 -0.193,-1.693 0.507,-1.693 1.207,-1.693 1.907,-1.693 -1.593,1.107 -0.893,1.107 -0.193,1.107 0.507,1.107 1.207,1.107 1.907,1.107 -1.943,1.807 -1.243,1.807 -0.543,1.807 0.157,1.807 0.857,1.807 1.557,1.807 -1.593,2.507 -0.893,2.507 -0.193,2.507 0.507,2.507 1.207,2.507 1.907,2.507 -1.593,5.307 -0.893,5.307 -0.193,5.307 0.507,5.307 1.207,5.307 1.907,5.307 -1.943,6.007 -1.243,6.007 -0.543,6.007 0.157,6.007 0.857,6.007 1.557,6.007 -1.593,6.707 -0.893,6.707 -0.193,6.707 0.507,6.707 1.207,6.707 1.907,6.707 -4.043,7.407 -3.343,7.407 -2.643,7.407 -1.943,7.407 -1.243,7.407 -0.543,7.407 0.157,7.407 0.857,7.407 1.557,7.407 2.257,7.407 2.957,7.407 3.657,7.407 -3.693,8.107 -2.993,8.107 -2.293,8.107 -1.593,8.107 -0.893,8.107 -0.193,8.107 0.507,8.107 1.207,8.107 1.907,8.107 2.607,8.107 3.307,8.107 4.007,8.107 -12.443,8.807 -11.743,8.807 -11.043,8.807 -10.343,8.807 -9.643,8.807 -8.943,8.807 -8.243,8.807 -7.543,8.807 -6.843,8.807 -6.143,8.807 -5.443,8.807 -4.743,8.807 -4.043,8.807 -3.343,8.807 -2.643,8.807 -1.943,8.807 -1.243,8.807 -0.543,8.807 0.157,8.807 0.857,8.807 1.557,8.807 2.257,8.807 2.957,8.807 3.657,8.807 -12.793,9.507 -12.093,9.507 -11.393,9.507 -10.693,9.507 -9.993,9.507 -9.293,9.507 -8.593,9.507 -7.893,9.507 -7.193,9.507 -6.493,9.507 -5.793,9.507 -5.093,9.507 -4.393,9.507 -3.693,9.507 -2.993,9.507 -2.293,9.507 -1.593,9.507 -0.893,9.507 -0.193,9.507 0.507,9.507 1.207,9.507 1.907,9.507 2.607,9.507 3.307,9.507 4.007,9.507 -12.443,10.207 -11.743,10.207 -11.043,10.207 -10.343,10.207 -9.643,10.207 -8.943,10.207 -8.243,10.207 -7.543,10.207 -6.843,10.207 -6.143,10.207 -5.443,10.207 -4.743,10.207 -4.043,10.207 -3.343,10.207 -2.643,10.207 -1.943,10.207 -1.243,10.207 -0.543,10.207 0.157,10.207 0.857,10.207 1.557,10.207 2.257,10.207 2.957,10.207 3.657,10.207 -12.793,10.907 -12.093,10.907 -11.393,10.907 -10.693,10.907 -9.993,10.907 -9.293,10.907 -8.593,10.907 -7.893,10.907 -7.193,10.907 -6.493,10.907 -5.793,10.907 -5.093,10.907 -4.393,10.907 -3.693,10.907 -2.993,10.907 -2.293,10.907 -1.593,10.907 -0.893,10.907 -0.193,10.907 0.507,10.907 1.207,10.907 1.907,10.907 2.607,10.907 3.307,10.907 4.007,10.907 -12.443,11.607 -11.743,11.607 -11.043,11.607 -10.343,11.607 -9.643,11.607 -8.943,11.607 -8.243,11.607 -7.543,11.607 -6.843,11.607 -6.143,11.607 -5.443,11.607 -4.743,11.607 -4.043,11.607 -3.343,11.607 -2.643,11.607 -1.943,11.607 -1.243,11.607 -0.543,11.607 0.157,11.607 0.857,11.607 1.557,11.607 2.257,11.607 2.957,11.607 3.657,11.607 -12.793,12.307 -12.093,12.307 -11.393,12.307 -10.693,12.307 -9.993,12.307 -9.293,12.307 -8.593,12.307 -7.893,12.307 -7.193,12.307 -6.493,12.307 -5.793,12.307 -5.093,12.307 -4.393,12.307 -3.693,12.307 -2.993,12.307 -2.293,12.307 -1.593,12.307 -0.893,12.307 -0.193,12.307 0.507,12.307 1.207,12.307 1.907,12.307 2.607,12.307 3.307,12.307 4.007,12.307 -12.443,13.007 -11.743,13.007 -11.043,13.007 -10.343,13.007 -9.643,13.007 -8.943,13.007 -8.243,13.007 -7.543,13.007 -6.843,13.007 -6.143,13.007 -5.443,13.007 -4.743,13.007 -4.043,13.007 -3.343,13.007 -2.643,13.007 -1.943,13.007 -1.243,13.007 -0.543,13.007 0.157,13.007 0.857,13.007 1.557,13.007 2.257,13.007 2.957,13.007 3.657,13.007 -12.793,13.707 -12.093,13.707 -11.393,13.707 -10.693,13.707 -9.993,13.707 -9.293,13.707 -8.593,13.707 -7.893,13.707 -7.193,13.707 -6.493,13.707 -5.793,13.707 -5.093,13.707 -4.393,13.707 -3.693,13.707 -2.993,13.707 -2.293,13.707 -1.593,13.707 -0.893,13.707 -0.193,13.707 0.507,13.707 1.207,13.707 1.907,13.707 2.607,13.707 3.307,13.707 4.007,13.707 -12.443,14.407 -11.743,14.407 -11.043,14.407 -10.343,14.407 -9.643,14.407 -8.943,14.407 -8.243,14.407 -7.543,14.407 -12.793,15.107 -12.093,15.107 -11.393,15.107 -10.693,15.107 -9.993,15.107 -9.293,15.107 -8.593,15.107 -7.893,15.107 -12.443,15.807 -11.743,15.807 -11.043,15.807 -10.343,15.807 -9.643,15.807 -8.943,15.807 -8.243,15.807 -7.543,15.807 -12.793,16.507 -12.093,16.507 -11.393,16.507 -10.693,16.507 -9.993,16.507 -9.293,16.507 -8.593,16.507 -7.893,16.507 -12.443,17.207 -11.743,17.207 -11.043,17.207 -10.343,17.207 -9.643,17.207 -8.943,17.207 -8.243,17.207 -7.543,17.207 -12.793,17.907 -12.093,17.907 -11.393,17.907 -10.693,17.907 -9.993,17.907 -9.293,17.907 -8.593,17.907 -7.893,17.907 -12.443,18.607 -11.743,18.607 -11.043,18.607 -10.343,18.607 -9.643,18.607 -8.943,18.607 -8.243,18.607 -7.543,18.607 -12.793,19.307 -12.093,19.307 -11.393,19.307 -10.693,19.307 -9.993,19.307 -9.293,19.307 -8.593,19.307 -7.893,19.307 -12.443,20.007 -11.743,20.007 -11.043,20.007 -10.343,20.007 -9.643,20.007 -8.943,20.007 -8.243,20.007 -7.543,20.007 -12.793,20.707 -12.093,20.707 -11.393,20.707 -10.693,20.707 -9.993,20.707 -9.293,20.707 -8.593,20.707 -7.893,20.707 -12.443,21.407 -11.743,21.407 -11.043,21.407 -10.343,21.407 -9.643,21.407 -8.943,21.407 -8.243,21.407 -7.543,21.407 -12.793,22.107 -12.093,22.107 -11.393,22.107 -10.693,22.107 -9.993,22.107 -9.293,22.107 -8.593,22.107 -7.893,22.107 -12.443,22.807 -11.743,22.807 -11.043,22.807 -10.343,22.807 -9.643,22.807 -8.943,22.807 -8.243,22.807 -7.543,22.807 -12.793,23.507 -12.093,23.507 -11.393,23.507 -10.693,23.507 -9.993,23.507 -9.293,23.507 -8.593,23.507 -7.893,23.507 -12.443,24.207 -11.743,24.207 -11.043,24.207 -10.343,24.207 -9.643,24.207 -8.943,24.207 -8.243,24.207 -7.543,24.207 -12.793,24.907 -12.093,24.907 -11.393,24.907 -10.693,24.907 -9.993,24.907 -9.293,24.907 -8.593,24.907 -7.893,24.907 -8.243,25.607 -7.543,25.607 -7.893,26.307 -7.543,27.007 -7.543,28.407 -7.893,29.107 -12.443,29.807 -8.943,29.807 -8.243,29.807 -7.543,29.807 -12.793,30.507 -12.093,30.507 -11.393,30.507 -10.693,30.507 -9.993,30.507 -9.293,30.507 -8.593,30.507 -7.893,30.507 -12.443,31.207 -11.743,31.207 -11.043,31.207 -10.343,31.207 -9.643,31.207 -8.943,31.207 -8.243,31.207 -7.543,31.207 -12.793,31.907 -12.093,31.907 -11.393,31.907 -10.693,31.907 -9.993,31.907 -9.293,31.907 -8.593,31.907 -7.893,31.907
GND: C1.1 D3.C D4.A J1.2 J2.23 J3.24 J5.23 J6.19 J6.20 P1.24 P2.23 P3.24 P4.19 P4.20 P5.2 P6.2 P7.2 P8.2 P9.2 P10.2 P11.2 P12.2 P13.2 P14.2 P15.2 P16.2 P17.2 P18.2 P19.2 P20.2 R2.1 R3.1 Scr1.1 Scr2.1 Scr3.1 Scr4.1